# Altium PCB Aurduino_Nano.PcbDoc
Units mil, origin at the board's own origin, x right, y up, seen from the top; angles counter-clockwise.
Board outline 800 x 1680 mil, 4 copper layers (Top Layer, Layer 1, Layer 2, Bottom Layer), stack 23.756 mil thick; 27 components, 40 nets, 160 pads, 31 vias.
Unrouted connection lines stored in the file: 20.
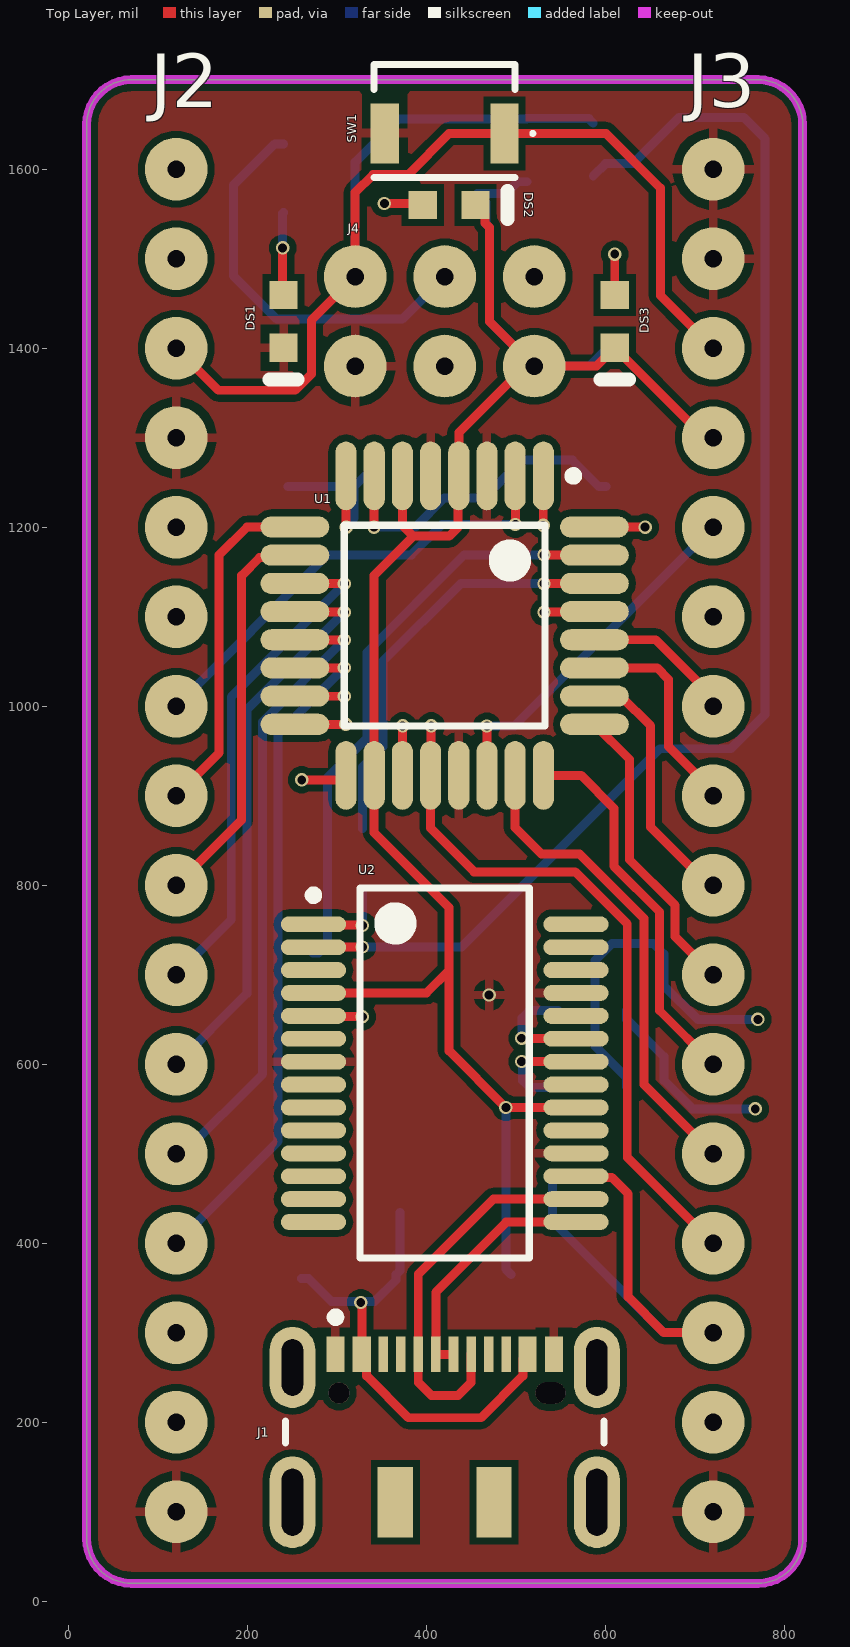
[diagram p0: Top Layer view]
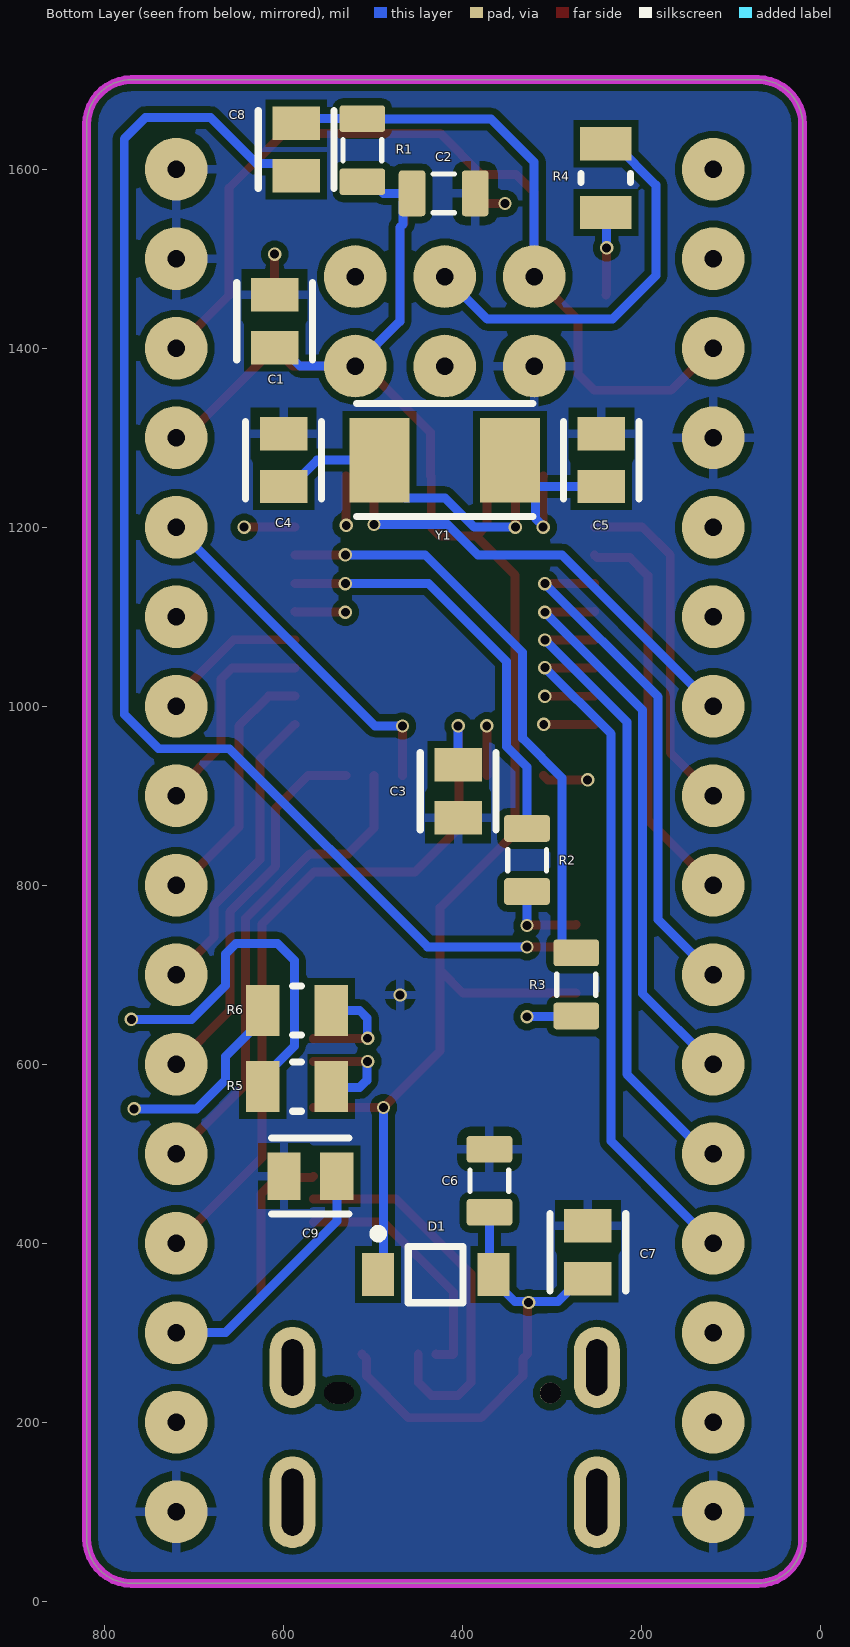
[diagram p1: Bottom Layer view, seen from below]
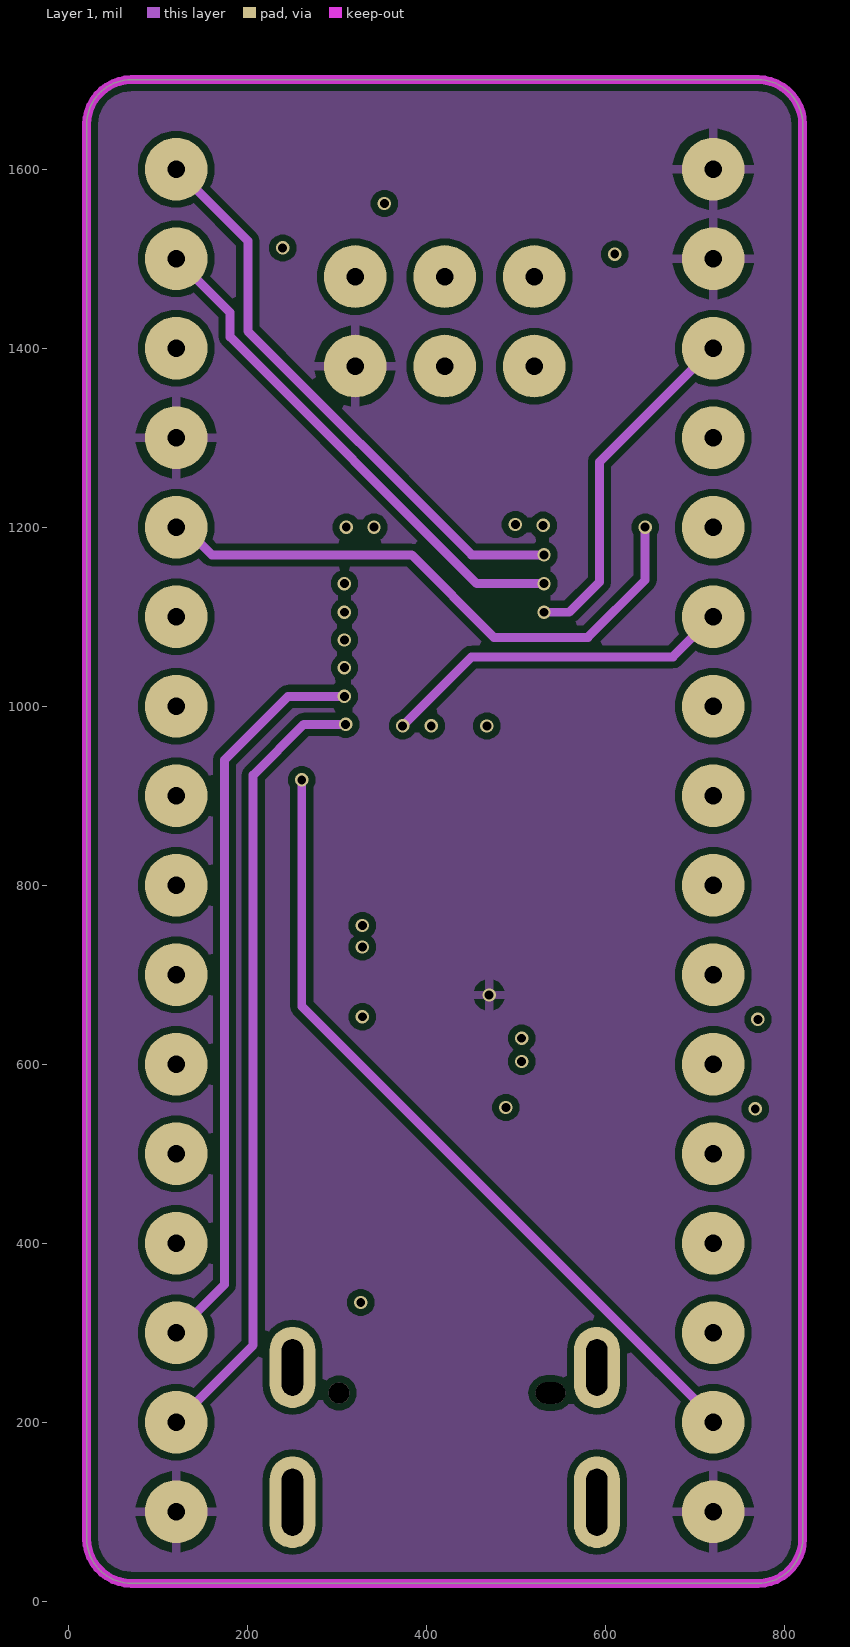
[diagram p2: Layer 1]
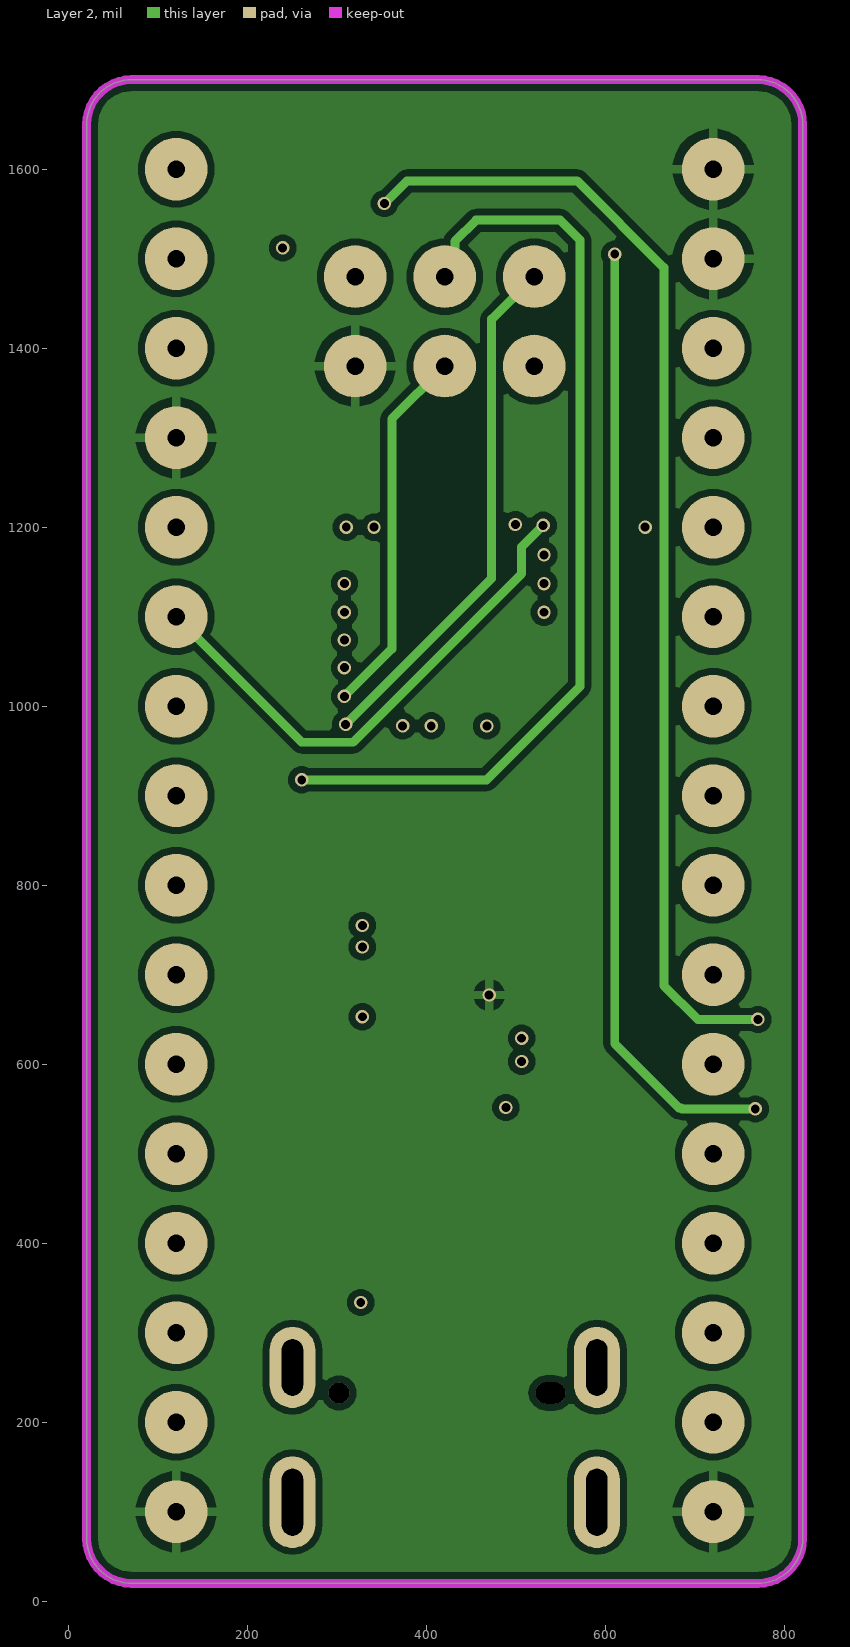
[diagram p3: Layer 2]
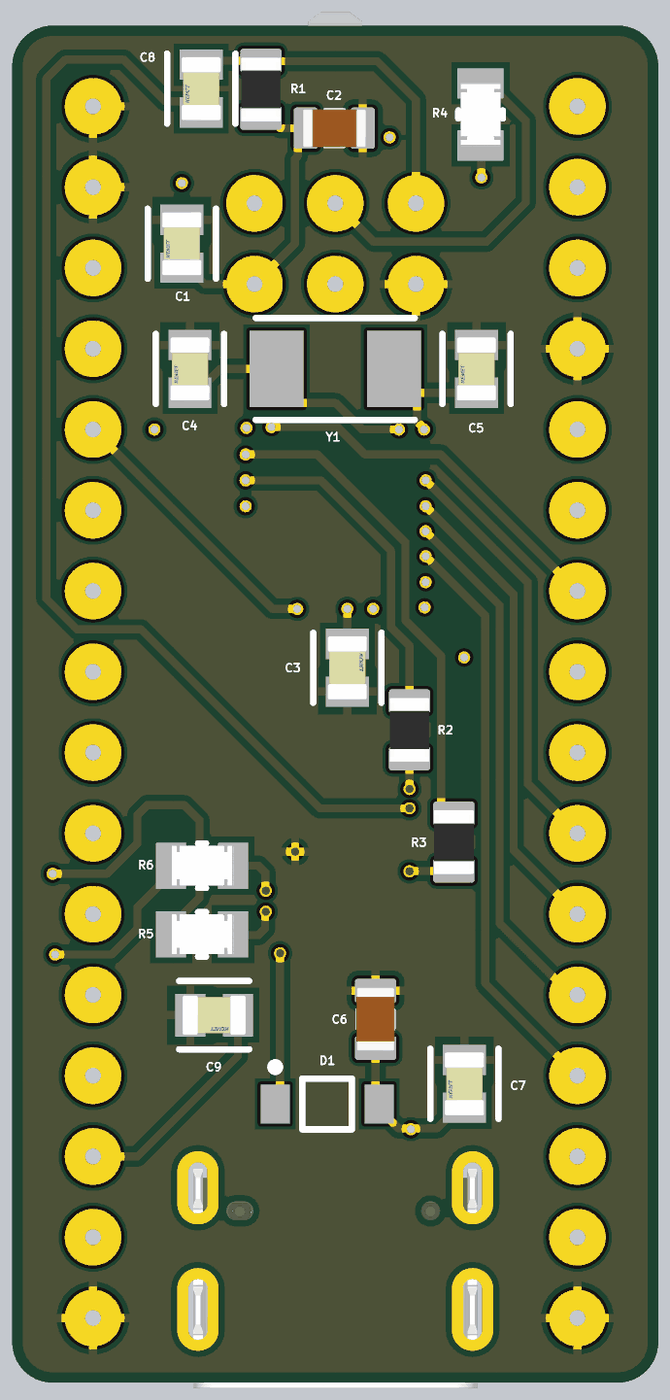
[diagram p4: 3D render of the assembled board from below, using the file's embedded part models]

## Layer stack, top to bottom
Top Solder: solder mask 0.4, Solder Resist, Dk 3.5
Top Layer: signal copper 1.4
Dielectric 2: prepreg 2.8, PP-006, Dk 4.1
Layer 1: signal copper 1.378
Dielectric 3: core 12.6, FR-4, Dk 4.8
Layer 2: signal copper 1.378
Dielectric 4: prepreg 2.8, PP-006, Dk 4.1
Bottom Layer: signal copper 1.4
Bottom Solder: solder mask 0.4, Solder Resist, Dk 3.5

## Board outline
20,70 20,1650 cw(c70,1650) 70,1700 770,1700 cw(c770,1650) 820,1650 820,70 cw(c770,70) 770,20 70,20 cw(c70,70)

## Design rules (kind name [scope] priority, off if disabled: settings)
Clearance [All] p1: gap=7.5 ignorepadtopadclearanceinfootprint=TRUE
MinimumSolderMaskSliver [All] p1: minsoldermaskwidth=0.4
PolygonConnect [All] p1: connectstyle=Relief reliefconductorwidth=10 reliefentries=4 polygonreliefangle="90 Angle" airgapwidth=10
RoutingVias [All] p1: holewidth=28 width=50 viastyle="Through Hole" minholewidth=7.5 minwidth=50 maxholewidth=10 maxwidth=50
SilkToSolderMaskClearance [IsPad] p1: minsilkscreentomaskgap=2 clearancetoexposedcopper=TRUE
SolderMaskExpansion [All] p1: expansion=4 istentingtop=FALSE
Width [All] p1: maxlimit=15 minlimit=5 preferedwidth=10
28 further rules are at their usual default settings.

## Classes and differential pairs
component class 3_Connectors: J2 J4
component class 2_Power_Supply: C6 C7 C8 C9 D1 DS2 DS3 J1 R5 R6 U2
component class 1_uC: C1 C2 C3 C4 C5 DS1 R1 R2 R3 R4 SW1 U1 Y1

## Components (designator, comment, footprint, x,y, rotation, side; value= is the part's Value field where it differs from the comment)
C1 "0.1uF" FP-C0805C-DN-MFG 610,1430 r90 bottom value="0.10 μF"
C2 "Capacitor 4.7µF +/-40% 25V 0805" CAPC0805(2012)145_L 421,1573 r180 bottom value=4.7µF
C3 "0.1uF" FP-C0805C-DN-MFG 405,905 r270 bottom value="0.10 μF"
C4 "22pF" FP-C0805C-DN-MFG 600,1275 r90 bottom value="22 pF"
C5 "22pF" FP-C0805C-DN-MFG 245,1275 r90 bottom value="22 pF"
C6 "Capacitor 4.7µF +/-40% 25V 0805" CAPC0805(2012)145_L 370,470 r90 bottom value=4.7µF
C7 "0.1uF" FP-C0805C-DN-MFG 260,390 r90 bottom value="0.10 μF"
C8 "0.1uF" FP-C0805C-DN-MFG 586,1622 r90 bottom value="0.10 μF"
C9 "0.1uF" FP-C0805C-DN-MFG 570,475 r0 bottom value="0.10 μF"
D1 "MBR0520LT3G" ONSC-SOD-123-2-425-04_V 430,365 r180 bottom
DS1 "HSMA-C190" AVAG-HSMX-C190_V 240,1430 r270 top
DS2 "Tx_LED" EVRL-0603-2_V 425,1560 r0 top
DS3 "Rx_LED" EVRL-0603-2_V 610,1430 r270 top
J1 "DX07S016JA1R1500" FP-DX07S016JA1R1500-MFG 420,150 r0 top
J2 "BBL-116-T-E" BBL-116-T-E 120,1600 r0 top
J3 "BBL-116-T-E" BBL-116-T-E 720,1600 r0 top
J4 "TD-103-T-A" TD-103-T-A 520,1480 r270 top
R1 "1KR5J" RESC0805(2012)_L 512,1621 r270 bottom value=1k
R2 "1KR5J" RESC0805(2012)_L 328,828 r270 bottom value=1k
R3 "1KR5J" RESC0805(2012)_L 273,689 r270 bottom value=1k
R4 "330" FP-CRCW0805-e3-MFG 240,1590 r90 bottom
R5 "330" FP-CRCW0805-e3-MFG 585,575 r0 bottom
R6 "330" FP-CRCW0805-e3-MFG 585,660 r0 bottom
SW1 "B3U-3000P" OMRON-B3U-3000P_V 420,1640 r180 top
U1 "ATmega328P-AU" 32A_M 420,1090 r270 top
U2 "FT232RL" FTDI-SSOP-28_M 420,590 r0 top
Y1 "16MHz" JPY-X053201602002_V 420,1275 r180 bottom

## Footprints (in the part's own frame and the unit in brackets; to place one, negate y for a bottom-side part, rotate by r counter-clockwise, add the part's x,y. Pads: shape width x height; smd on the part's side, far side on the other; paste and mask are expansions set on the pad)
32A_M [mm] "Thin QFP, 32-Leads, Body 7x7mm, Pitch 0.8mm, IPC Low Density"
  oval 1.95x0.6 smd: 1(-4.25,2.8) 2(-4.25,2) 3(-4.25,1.2) 4(-4.25,0.4) 5(-4.25,-0.4) 6(-4.25,-1.2) 7(-4.25,-2) 8(-4.25,-2.8) 17(4.25,-2.8) 18(4.25,-2) 19(4.25,-1.2) 20(4.25,-0.4) 21(4.25,0.4) 22(4.25,1.2) 23(4.25,2) 24(4.25,2.8)
  oval 0.6x1.95 smd: 9(-2.8,-4.25) 10(-2,-4.25) 11(-1.2,-4.25) 12(-0.4,-4.25) 13(0.4,-4.25) 14(1.2,-4.25) 15(2,-4.25) 16(2.8,-4.25) 25(2.8,4.25) 26(2,4.25) 27(1.2,4.25) 28(0.4,4.25) 29(-0.4,4.25) 30(-1.2,4.25) 31(-2,4.25) 32(-2.8,4.25)
  silkscreen extent -4.37,-2.85 2.85,3.78, body extent -3.5,-3.5 3.5,3.5, height 1.2
AVAG-HSMX-C190_V [mm] "SMD, 2-Leads, Body 1.6x0.8mm, Height 0.9mm"
  rect 0.8x0.8 smd: 1(-0.75,0) 2(0.75,0)
  silkscreen extent 1.65,-0.4 1.65,0.4, body extent -0.8,-0.4 0.8,0.4, height 0.9
BBL-116-T-E [mm] "16 POS Header, Through Hole"
  round 1.78 hole 0.5: 1(0,0) 2(0,-2.54) 3(0,-5.08) 4(0,-7.62) 5(0,-10.16) 6(0,-12.7) 7(0,-15.24) 8(0,-17.78) 9(0,-20.32) 10(0,-22.86) 11(0,-25.4) 12(0,-27.94) 13(0,-30.48) 14(0,-33.02) 15(0,-35.56) 16(0,-38.1)
CAPC0805(2012)145_L [mm] "Chip Capacitor, Body 2.0x1.2mm, Height 1.45mm, IPC High Density"
  rrect25% 0.76x1.3 smd: 1(-0.9,0) 2(0.89,0)
  silkscreen extent -0.3,-0.55 0.3,0.55, body extent -1,-0.6 1,0.6, height 1.45
EVRL-0603-2_V [mm] "SMD, 2-Leads, Body 1.6x0.8mm"
  rect 0.8x0.8 smd: 1(-0.75,0) 2(0.75,0)
  silkscreen extent 1.65,-0.4 1.65,0.4, body extent -0.8,-0.4 0.8,0.4, height 0.5
FP-C0805C-DN-MFG [mm]
  rect 0.95x1.35 smd paste+0 mask+0: 1(-0.75,0) 2(0.75,0)
  silkscreen extent -1.1,-1.07 1.1,1.07, body extent -1,-0.63 1,0.63, height 0.88
FP-CRCW0805-e3-MFG [mm]
  rect 0.95x1.45 smd paste+0 mask+0: 1(-0.975,0) 2(0.975,0)
  silkscreen extent -0.13,-0.7 0.13,0.7, body extent -1,-0.63 1,0.63, height 0.5
FP-DX07S016JA1R1500-MFG [mm]
  rrect100% 1.3x2.3 hole 1.6 slot 0.6 at 0 deg paste-1000 mask+0: 1(-4.32,2.825) 2(4.32,2.825)
  rrect100% 1.3x2.6 hole 1.9 slot 0.6 at 0 deg paste-1000 mask+0: 3(-4.32,-1) 6(4.32,-1)
  rect 1x2 smd paste+0 mask+0: 4(-1.4,-1) 5(1.4,-1)
  rect 0.52x1 smd paste+0 mask+0: A1/B12(-3.1,3.2) A4/B9(-2.35,3.2) A12/B1(3.1,3.2) B4/A9(2.35,3.2)
  rect 0.27x1 smd paste+0 mask+0: A5(-1.75,3.2) A6(-0.25,3.2) A7(0.75,3.2) A8(1.75,3.2) B5(1.25,3.2) B6(0.25,3.2) B7(-0.75,3.2) B8(-1.25,3.2)
  round 0.6 hole 0.6 unplated paste-1000 mask+0: ""(-3,2.1)
  rrect100% 0.85x0.6 hole 0.6 slot 0.85 at 0 deg unplated paste-1000 mask+0: ""(3,2.1)
  silkscreen extent -4.52,0.67 4.52,4.37, body extent -5.07,-3.75 5.07,4.08, height 0.25
FTDI-SSOP-28_M [mm] "SOP, 28-Leads, Body 10.5x5.6mm, Pitch 0.65mm, IPC Low Density"
  oval 1.85x0.45 smd: 1(-3.725,4.225) 2(-3.725,3.575) 3(-3.725,2.925) 4(-3.725,2.275) 5(-3.725,1.625) 6(-3.725,0.975) 7(-3.725,0.325) 8(-3.725,-0.325) 9(-3.725,-0.975) 10(-3.725,-1.625) 11(-3.725,-2.275) 12(-3.725,-2.925) 13(-3.725,-3.575) 14(-3.725,-4.225) 15(3.725,-4.225) 16(3.725,-3.575) 17(3.725,-2.925) 18(3.725,-2.275) 19(3.725,-1.625) 20(3.725,-0.975) 21(3.725,-0.325) 22(3.725,0.325) 23(3.725,0.975) 24(3.725,1.625) 25(3.725,2.275) 26(3.725,2.925) 27(3.725,3.575) 28(3.725,4.225)
  silkscreen extent -3.85,-5.25 2.4,5.25, body extent -3.9,-5.25 3.9,5.25, height 2
JPY-X053201602002_V [mm] "SMD, 2-Leads, Body 5x3.2mm"
  rect 1.7x2.4 smd: 1(-1.85,0) 2(1.85,0)
  silkscreen extent -2.5,-1.6 2.5,1.6, body extent -2.5,-1.6 2.5,1.6, height 1.35
OMRON-B3U-3000P_V [mm] "SMD, 2-Leads, Body 4x3.2mm"
  rect 0.8x1.7 smd: 1(-1.7,0) 2(1.7,0)
  silkscreen extent -2.55,-1.95 2,1.25, body extent -2,-1.95 2,1.25, height 1.2
ONSC-SOD-123-2-425-04_V [mm] "SOD, 2-Leads, Body 2.69x1.6mm"
  rect 0.91x1.22 smd: 1(-1.635,0) 2(1.635,0)
  silkscreen extent -1.76,-0.8 0.78,1.28, body extent -1.35,-0.8 1.35,0.8, height 1.35
RESC0805(2012)_L [mm] "Chip Resistor, Body 2.0x1.3mm, IPC High Density"
  rrect25% 0.76x1.3 smd: 1(-0.9,0) 2(0.89,0)
  silkscreen extent -0.3,-0.55 0.3,0.55, body extent -1,-0.62 1,0.63, height 0.6
TD-103-T-A [mm]
  round 1.78 hole 0.5: 1(0,0) 2(2.54,0) 3(0,-2.54) 4(2.54,-2.54) 5(0,-5.08) 6(2.54,-5.08)

## Part data
C1 C3 C7 C8 C9: library part CMP-03020-002581-2, "C0805 0.10 μF X7R 30ppm/°C 20.00% 50 V", Capacitance="0.10 μF", Manufacturer=KEMET, Manufacturer Part Number=C0805C104M5RAC, Package=C0805C-DN, Temperature="-55°C to +125°C", Temperature Characteristic=X7R, Temperature Coefficient=30ppm/°C, Temperature Range High=+125°C, Temperature Range Low=-55°C, Tolerance=0.2, Voltage Rating="50 V", Automotive=No, Category=Cap, ComponentLink2Description=Datasheet, ComponentLink2URL=https://content.kemet.com/datasheets/KEM_C1003_C0G_SMD.pdf, Device Class L1="Passive Components", Device Class L2=Capacitors, Device Class L3="Ceramic Capacitors", Height=0.88mm, Ipc Land Pattern Name=CAPC200125X78, Lead Free=Yes, Material=Ceramic, Mouser Description="Multilayer Ceramic Capacitors MLCC - SMD/SMT 50volts 0.1uF 20% X7R", Octopart=https://octopart.com/c0805c104m5rac-kemet-2226142, RoHS=TRUE
C2 C6: library part CMP-001-00080-4, "Chip Capacitor, 4.7µF +/-40%, 25V, 0805, Thickness 1.45 mm", Case/Package=0805, Max Operating Temperature=85°C, Min Operating Temperature=-55°C, Tolerance=20%, Voltage Rating=25V, Mounting Technology=SMT, Pins=2
C4 C5: library part CMP-03020-014766-1, "C0805 22 pF X8R 30ppm/°C 5.00% 50 V", Capacitance="22 pF", Manufacturer=KEMET, Manufacturer Part Number=C0805C220J5HACTU, Package=C0805C-DN, Temperature="-55°C to +125°C", Temperature Characteristic=X8R, Temperature Coefficient=30ppm/°C, Temperature Range High=+125°C, Temperature Range Low=-55°C, Tolerance=0.05, Voltage Rating="50 V", Automotive=No, Category=Cap, ComponentLink2Description=Datasheet, ComponentLink2URL=https://content.kemet.com/datasheets/KEM_C1003_C0G_SMD.pdf, Device Class L1="Passive Components", Device Class L2=Capacitors, Device Class L3="Ceramic Capacitors", Height=0.88mm, Ipc Land Pattern Name=CAPC200125X78, Lead Free=Yes, Material=Ceramic, Octopart=https://octopart.com/c0805c220j5hactu-kemet-88697040, RoHS=TRUE
D1: library part CMP-1055-00408-1, "Schottky Power Rectifier, 2-Pin SOD-123, Pb-Free, Tape and Reel", Manufacturer="On Semiconductor", ComponentLink1Description="Manufacturer URL", ComponentLink1URL=http://www.onsemi.com/, ComponentLink2Description=Datasheet, ComponentLink2URL=http://www.onsemi.cn/pub_link/Collateral/MBR0520LT1-D.PDF, ComponentLink3Description="Package Specification", ComponentLink3URL=http://www.onsemi.com/pub_link/Collateral/425-04.PDF, Configuration=Single, DatasheetVersion="Rev. 6", IFSM Max (A)=5.5, Mounting Technology="Surface Mount", PackageDescription="2-Pin SOD, Body 1.6 x 2.69 mm", PackageReference=SOD-123-2-425-04, PackageVersion="Rev. G, 10/2009", Packing="Tape and Reel", PartNumber=MBR0520LT3G, RoHS=TRUE
DS1: library part CMP-007-00011-2, "LED Uni-Color Amber, 60 mW, 20 mA, -40 to 85 degC, 2-Pin SMD, RoHS, Tape and Reel", Case/Package=0603, Colour=Orange, Forward Current=20mA, Forward Voltage=1.9V, Manufacturer=Avago, Max Operating Temperature=85°C, Min Operating Temperature=-40°C, Package Description="2-Pin Surface Mount Device, Body 1.6 x 0.8 mm, Height 0.9 mm", Package Quantity=4000, Package Reference=HSMX-C190, Power=60mW, Datasheet URL=http://docs.avagotech.com/docs/AV02-0112EN, Datasheet Version=Sep-10, Illumination Colour=Orange, Lens Style=Diffused, Luminous Intensity=90mcd, Manufacturer URL=http://www.avagotech.com/, Mounting Technology=SM, Nominal Vf=1.9V, Packaging=TapeandReel, Pins=2, RoHS Compliant=True, Viewing Angle=170degrees
DS2: library part CMP-007-00002-2, "Chip LED, Yellow-Green, 5 V, 25 mA, -40 to 85 degC, 2-Pin SMD (0603), RoHS, Tape and Reel", Case/Package=0603, Colour=Green, Forward Voltage=2V, Manufacturer="Everlight Electronics", Package Description="2-Pin Surface Mount Device, Body 1.6 x 0.8 mm", Datasheet URL=https://datasheet.ciiva.com/48679/19-217-g7c-an1p2-3t-48679179.pdf, Datasheet Version="Rev. 1, 04/2006", Lens Style=Clear, Manufacturer URL=http://www.everlight.com/, Mounting Technology=SM, Package Reference=0603, Pins=2, RoHS Compliant=True, Viewing Angle=120degrees
DS3: library part CMP-007-00004-2, "Chip LED, Red, 5 V, 25 mA, -40 to 85 degC, 2-Pin SMD (0603), RoHS, Tape and Reel", Case/Package=0603, Colour=Red, Forward Voltage=2.2V, Manufacturer="Everlight Electronics", Package Description="2-Pin Surface Mount Device, Body 1.6 x 0.8 mm", Datasheet URL=https://datasheet.ciiva.com/4688/el-19-217-r6c-al1m2vy-3tpdf-187026-4688713.pdf, Datasheet Version="Rev. 1, 01/2005", Lens Style=Clear, Manufacturer URL=http://www.everlight.com/, Mounting Technology=SM, Package Reference=0603, RoHS Compliant=False
J1: library part CMP-19038-000003-1, "CONN RCP USB2.0 TYP C 24P SMD RA"
J2 J3: "16 POS Header, Through Hole"
J4: "AVRISP MK2"
R1 R2 R3: library part CMP-009-00076-2, "1K 0.125W 5% 0805 (2012 Metric)  SMD", Case/Package=0805, Power=125mW, Tolerance=5%, Mounting Technology=SMT, Pins=2
R4 R5 R6: library part CMP-2001-03823-2, "RES Thick Film, 330Ω, 1%, 0.125W, 100ppm/°C, 0805", Case Code (Imperial)=0805, Case Code (Metric)=2012, Max Operating Temperature=155°C, Max Power Dissipation=125mW, Min Operating Temperature=-55°C, Package Quantity=10, Resistance=330R, Temperature Coefficient=100ppm/°C, Tolerance=1%, Voltage Rating=150V, Case/Package=0805, Composition="Thick Film", Contact Plating=Tin, Depth=1.25mm, Features="Automotive AEC-Q200", Height=0.02inch, Lead Free="Lead Free", Length=2mm, Military Standard=Not, Mount="Surface Mount", Number of Terminations=2, Packaging="Tape and Reel", Power Rating=125mW, Termination=SMD/SMT, Voltage Rating (DC)=150V, Weight=0.000194oz, Width=0.049inch
SW1: library part CMP-011-00005-2, "Tactile Switch, SPST-NO, 0.05 A, 12 V, -25 to 70 degC, 2-Pin SMD, RoHS, Tape and Reel", Contact Current Rating=50mA, IP Rating=IP40, Manufacturer="Omron Electronic Components", Max Contact Resistance=100mohm, Max Operating Temperature=70°C, Max Voltage Rating (DC)=12V, Min Operating Temperature=-25°C, Operating Force=162gf, Package Description="2-Pin Surface Mount Device, Body 4 x 3.2 mm", Package Quantity=4000, Case/Package=B3U-3000P, Contact Material=Silver, Current Rating=50mA, Datasheet URL=https://www.omron.com/ecb/products/pdf/en-b3u.pdf, Datasheet Version=Jan-15, Manufacturer URL=http://www.omron.com/, Max Current Rating=50mA, Mounting Technology=SM, Package Reference=B3U-3000P, Packaging=TapeandReel, RoHS Compliant=True, Throw Configuration=SPST, Voltage Rating=12V, Voltage Rating (DC)=12V
U1: library part CMP-0095-00269-2, "8-bit AVR Microcontroller, 32KB Flash, 1KB EEPROM, 2KB SRAM, 32-pin TQFP, Industrial Grade (-40°C to 85°C)", Code_JEDEC=MS-026-ABA, ComponentLink1Description="Manufacturer URL", ComponentLink1URL=http://www.atmel.com/, ComponentLink2Description="ATmega48A/48PA/88A/88PA/168A/168PA/328/328P Datasheet", ComponentLink2URL=http://www.atmel.com/dyn/resources/prod_documents/doc8271.pdf, ComponentLink3Description="ATmega48A/48PA/88A/88PA/168A/168PA/328/328P Summary", ComponentLink3URL=http://www.atmel.com/dyn/resources/prod_documents/8271S.pdf, DatasheetVersion="revD, May-2011", PackageDescription="32-Lead, 7x7x1.0 mm Body, 0.8mm Lead Pitch, Thin Profile Plastic Quad Flat Package (TQFP)", PackageReference=32A, PackageVersion="revC, Oct-2010", RevisionNote="DatasheetVersion & PackageVersion updated. URLs added."
U2: library part CMP-2000-05029-1, "IC USB FS SERIAL UART 28-SSOP", Manufacturer=FTDI, Maximum Operating Temperature=+85degC, Minimum Operating Temperature=-40degC, Package Type=SSOP, Datasheet URL=http://datasheet.octopart.com/FT232RL-FTDI-datasheet-120501.pdf, Datasheet Version="Rev. 1.04, 02/2006", Dimensions=10.2x5.3x1.75mm, Height=1.75mm, Length=10.2mm, Manufacturer URL=http://www.ftdichip.com/, Maximum Data Rate=3MBd, Mounting Type=SurfaceMount, Number of Channels per Chip=1, Pin Count=28, Receive FIFO=256B, Transmit FIFO=128B, Width=5.3mm
Y1: library part CMP-003-00006-2, "SMD Crystal, 16 MHz, +/- 20 ppm, 8 pF, -20 to 70 degC, 2-Pin SMD", Case/Package=X053201602002, Manufacturer="Shenzhen Jingpengyuan", Package Description="2-Pin Surface Mount Device, Body 5 x 3.2 mm", Datasheet URL=http://datasheet.octopart.com/X053201602002-Jingpengyuan-datasheet-62330935.pdf, Datasheet Version=May-13, Frequency=16MHz, Manufacturer URL=http://www.chjiahui.com/, Mounting Technology=SM, Package Reference=X053201602002, RoHS Compliant=Unknown

## Via types
v1: diameter 15, hole 10, Top Layer to Bottom Layer, 31 vias

## Nets (pads, with @x,y where several pads share a name; then routed paths per layer and width w, separated by ;. In a path a pad name is that pad's centre, name@x,y a point inside that pad or via, vN(x,y) a via of type N, cw(c..) or ccw(c..) an arc to the next point about the centre after c; other vN are vias at no path point)
+3V3: C9.1 J3.14 U2.17 | length 574.7
  Top Layer w10: U2.17 568.05,473.44 606.56,473.44 625,455 625,340 665,300 J3.14
  Bottom Layer w10: C9.1 540.47,424.53 665,300 J3.14
+5: C1.1 C2.1 D1.1 DS2.2 DS3.2 J3.4 J4.2 R1.2 U1.4 U1.6 U1.18 U2.4 U2.20 | length 2330.6
  Top Layer w10: U2.4 399.57,679.57 425,705 ; U1.6 372.76,1202.24 385,1190 ; DS2.2 465.28,1549.25 465.28,1539.72 470,1535 470,1430 J4.2 ; U2.20 v1(488.39,551.61) 425,615 425,705 ; J3.4 710.47,1300 DS3.2 589.53,1380 J4.2 ; 385,1190 341.26,1146.26 U1.18 341.26,858.74 425,775 425,705 ; 385,1190 425,1190 435,1200 435,1256.57 U1.4 435.75,1305.75 510,1380 J4.2
  Bottom Layer w10: v1(488.39,551.61) 488.39,370.98 D1.1 ; R1.2 501.37,1585.96 488.41,1573 C2.1 466.39,1563.04 466.39,1538.61 470,1535 470,1430 J4.2 581.65,1380 602.13,1400.47 C1.1
A0: J3.12 U1.23 | length 539.2
  Top Layer w10: U1.23 498.74,864.26 528,835 570.51,835 642.5,763.01 642.5,577.5 J3.12
A1: J3.11 U1.24 | length 425.9
  Top Layer w10: U1.24 572.32,922.68 609,886 609,821.25 660,770.25 660,660 J3.11
A2: J3.10 U1.25 | length 334.7
  Top Layer w10: U1.25 626.5,940.59 626.5,828.5 677.5,777.5 677.5,742.5 J3.10
A3: J3.9 U1.26 | length 286.4
  Top Layer w10: U1.26 616.78,1011.26 650,978.04 650,865 715,800 J3.9
A4: J3.8 U1.27 | length 238.7
  Top Layer w10: U1.27 657.24,1042.76 670,1030 670,955 720,905 J3.8
A5: J3.7 U1.28 | length 169.3
  Top Layer w10: U1.28 655.75,1074.25 720,1010 J3.7
A6: J3.6 U1.19 | length 453
  Top Layer w10: U1.19 372.88,922.8 372.88,977.88 v1(373,978)
  Layer 1 w10: v1(373,978) 450,1055 675,1055 J3.6
A7: J3.5 U1.22 | length 400.1
  Top Layer w10: v1(467.14,977.86) 467.19,977.81 U1.22 U1.22
  Bottom Layer w10: v1(467.14,977.86) 467.28,978 498,978 J3.5
AREF: C3.1 J3.13 U1.20 | length 818.6
  Top Layer w10: v1(405,978) 404.63,977.63 404.63,923.05 U1.20 404.25,863.75 453,815 565.76,815 624,756.76 624,496 J3.13
  Bottom Layer w10: C3.1 v1(405,978)
D0/Rx: J2.2 R2.1 U1.30 | length 1045.7
  Top Layer w10: v1(531,1137) 531.12,1137.12 587.2,1137.12 U1.30
  Layer 1 w10: J2.2 180.25,1439.75 180.25,1412.75 456,1137 v1(531,1137)
  Bottom Layer w10: R2.1 328,932 351,955 351,1050 438,1137 v1(531,1137)
D1/Tx: J2.1 R3.1 U1.31 | length 1312.2
  Top Layer w10: v1(531,1169) 531.13,1168.87 587.19,1168.87 U1.31
  Layer 1 w10: J2.1 200,1520 200,1419 450,1169 v1(531,1169)
  Bottom Layer w10: R3.1 279.04,724.43 289,734.39 289,920 333,964 333,1060 442,1169 v1(531,1169)
D2: J2.5 U1.32 | length 717.2
  Top Layer w10: U1.32 587.44,1200.12 643.88,1200.12 v1(644,1200)
  Layer 1 w10: J2.5 128.77,1200 159.77,1169 383,1169 475,1077 580,1077 644,1141 v1(644,1200)
D3: J2.6 U1.1 | length 641.4
  Top Layer w10: v1(530,1202) 530.12,1202.12 530.12,1257.2 U1.1
  Layer 2 w10: J2.6 260.27,959.73 317.6,959.73 506,1148.14 506,1178 v1(530,1202)
D4: J2.7 U1.2 | length 517.5
  Top Layer w10: U1.2 498.87,1257.19 498.87,1203.13 v1(499,1203)
  Bottom Layer w10: J2.7 289,1169 382.82,1169 416.82,1203 v1(499,1203)
D5: J2.8 U1.9 | length 386.5
  Top Layer w10: J2.8 168,948 168,1169 199.24,1200.24 U1.9
D6: J2.9 U1.10 | length 445.3
  Top Layer w10: J2.9 193,873 193,1146 213.13,1166.13 250.07,1166.13 U1.10
D7: J2.10 U1.11 | length 570.3
  Top Layer w10: U1.11 252.8,1137.12 307.88,1137.12 v1(308,1137)
  Bottom Layer w10: J2.10 181.5,761.5 181.5,1010.5 v1(308,1137)
D8: J2.11 U1.12 | length 638.5
  Top Layer w10: U1.12 253.05,1105.37 307.63,1105.37 v1(308,1105)
  Bottom Layer w10: J2.11 199,679 199,996 v1(308,1105)
D9: J2.12 U1.13 | length 711.7
  Top Layer w10: U1.13 252.8,1074.13 307.87,1074.13 v1(308,1074)
  Bottom Layer w10: J2.12 127.5,500 216.5,589 216.5,982.5 v1(308,1074)
D10: J2.13 U1.14 | length 776.3
  Top Layer w10: U1.14 252.8,1042.88 307.88,1042.88 v1(308,1043)
  Bottom Layer w10: J2.13 234,514 234,969 v1(308,1043)
GND: C1.2 C2.2 C3.2 C4.2 C5.2 C6.2 C7.2 C9.2 DS1.2 J1.A1/B12 J1.A12/B1 J2.4 J2.16 J3.1 J3.2 J3.16 J4.6 SW1.2 U1.3 U1.5 U1.21 U2.7 U2.18 U2.21 U2.25
  other v1: 469.69,677.31
MISO: J2.15 J4.1 U1.16 | length 1529.6
  Top Layer w10: U1.16@252.69,979.75 v1(309.31,979.73)
  Layer 1 w10: J2.15 206,286 206,923 262.73,979.73 v1(309.31,979.73)
  Layer 2 w10: v1(309.31,979.73) 472.46,1142.88 472.46,1432.46 J4.1
MOSI: J2.14 J4.4 U1.15 | length 1296.6
  Top Layer w10: U1.15 252.81,1011.13 307.87,1011.13 v1(308,1011)
  Layer 1 w10: J2.14 174,354 174,940 245,1011 v1(308,1011)
  Layer 2 w10: v1(308,1011) 361,1064 361,1321 J4.4
NetC4_1: C4.1 U1.7 Y1.1 | length 367.8
  Top Layer w10: v1(341,1200) 341.13,1200.13 341.13,1257.19 U1.7
  Bottom Layer w10: v1(341,1200) 386.98,1200 419.74,1232.76 464.37,1232.76 492.83,1261.22 Y1.1 562.6,1275 592.13,1245.47 C4.1
NetC5_1: C5.1 U1.8 Y1.2 | length 221.5
  Top Layer w10: U1.8 309.88,1257.2 309.88,1200.12 v1(310,1200)
  Bottom Layer w10: C5.1 Y1.2@318.7,1245.47 ; v1(310,1200) 310,1201.35 318.7,1210.05 Y1.2@318.7,1245.47 ; Y1.2 347.17,1273.94 Y1.2@318.7,1245.47
NetC8_1: C8.1 U2.2 | length 1484.6
  Top Layer w10: U2.2 273.47,730.87 327.87,730.87 v1(328,731)
  Bottom Layer w10: v1(328,731) 439,731 660.46,952.46 739.69,952.46 778,990.77 778,1634 754.14,1657.86 681.86,1657.86 630.17,1606.17 599.7,1606.17 C8.1
NetDS1_1: DS1.1 R4.1 | length 92.9
  Top Layer w10: v1(239,1512) 239,1460.53 DS1.1
  Bottom Layer w10: v1(239,1512) 239,1550.61 R4.1
NetDS2_1: DS2.1 R5.2 | length 1730.8
  Top Layer w10: v1(352.64,1561.64) 393.83,1561.64 DS2.1
  Layer 2 w10: v1(352.64,1561.64) 378,1587 568,1587 665,1490 665,687.77 702.77,650 v1(770,650)
  Bottom Layer w10: R5.2 623.39,584.84 588,620.23 588,716 607,735 653,735 665,723 665,687.77 702.77,650 v1(770,650)
NetDS3_1: DS3.1 R6.2 | length 1325.2
  Top Layer w10: DS3.1 v1(610,1505)
  Layer 2 w10: v1(610,1505) 610,623 682,551 684,551 685,550 v1(767,550)
  Bottom Layer w10: R6.2 623.39,650.16 665.05,608.49 665.05,581.95 697,550 v1(767,550)
NetR5_1: R5.1 U2.22 | length 125.5
  Top Layer w10: v1(506,603) 506.1,602.9 566.55,602.9 U2.22
  Bottom Layer w10: v1(506,603) 506.96,602.04 506.96,582.04 515,574 545.61,574 R5.1
NetR6_1: R6.1 U2.23 | length 127.3
  Top Layer w10: v1(506,629) 506.31,628.69 566.35,628.69 U2.23
  Bottom Layer w10: v1(506,629) 506.5,629.5 506.5,651.5 515,660 R6.1
Reset: C8.2 J2.3 J3.3 J4.5 R1.1 SW1.1 U1.29 | length 1860.7
  Top Layer w10: J2.3 167,1353 253,1353 271,1371 271,1431 J4.5 320,1574 340.04,1594.04 379.04,1594.04 425,1640 SW1.1 600,1640 661,1579 661,1459 J3.3 ; v1(531,1105) 531.37,1105.37 586.95,1105.37 U1.29
  Layer 1 w10: v1(531,1105) 559,1105 593,1139 593,1273 J3.3
  Bottom Layer w10: J4.5 320,1608 368,1656 511.57,1656 R1.1 581.09,1656.43 C8.2
Rx: R2.2 U2.1 | length 93.2
  Top Layer w10: U2.1 274.02,755.67 327.33,755.67 v1(328,755)
  Bottom Layer w10: v1(328,755) R2.2
SCK: J3.15 J4.3 R4.2 U1.17 | length 2467.3
  Top Layer w10: v1(260.31,917.73) 304.82,917.73 U1.17
  Layer 1 w10: v1(260.31,917.73) 260.31,664.54 720,204.85 J3.15
  Layer 2 w10: v1(260.31,917.73) 466.73,917.73 571,1022 571,1521 549,1543 455,1543 431.38,1519.38 431.38,1491.38 J4.3
  Bottom Layer w10: R4.2 230.16,1628.39 184,1582.23 184,1481 232.54,1432.46 372.46,1432.46 J4.3
Tx: R3.2 U2.5 | length 110.5
  Top Layer w10: U2.5 273.83,653.49 327.51,653.49 v1(328,653)
  Bottom Layer w10: R3.2 273.48,653.48 327.52,653.48 v1(328,653)
USB_N: J1.A7 J1.B7 U2.16 | length 434.4
  Top Layer w10: J1.A7 449.53,244.53 435,230 405,230 390.47,244.53 J1.B7 390.47,365.47 474.25,449.25 U2.16
USB_P: J1.A6 J1.B6 U2.15 | length 278.1
  Top Layer w10: J1.B6 429.53,275.67 410.47,275.67 J1.A6 410.16,345.16 488.66,423.66 U2.15
VBUS: C6.1 C7.1 D1.2 J1.A4/B9 J1.B4/A9 | length 527.3
  Top Layer w10: v1@327.48,332.52 J1.A4/B9 332.72,270.75 332.72,251.69 379.41,205 460.59,205 507.28,251.69 507.28,270.75 J1.B4/A9
  Bottom Layer w10: C7.1 267.87,360.47 293.35,335 305,335 305.28,334.72 325.28,334.72 v1(326.24,333.76) 327.2,334.72 341.45,334.72 365.63,358.9 D1.2 370,369.37 C6.1
pads on no net: J1. J1.1 J1.2 J1.3 J1.4 J1.5 J1.6 J1.A5 J1.A8 J1.B5 J1.B8 U2.3 U2.6 U2.8 U2.9 U2.10 U2.11 U2.12 U2.13 U2.14 U2.19 U2.24 U2.26 U2.27 U2.28

## Polygon pours and split planes (outlines as drawn)
GND on Bottom Layer "GND_L04_P003" (solid, remove dead copper, pour order 3): 25,1660 60,1695 780,1695 815,1660 815,60 780,25 60,25 25,60
GND on Layer 2 "GND_L03_P002" (solid, remove dead copper, pour order 2): 25,1660 60,1695 780,1695 815,1660 815,60 780,25 60,25 25,60
GND on Layer 1 "GND_L02_P001" (solid, remove dead copper, pour order 1): 25,1660 60,1695 780,1695 815,1660 815,60 780,25 60,25 25,60
GND on Top Layer "GND_L01_P000" (solid, remove dead copper, pour order 0): 25,1660 60,1695 780,1695 815,1660 815,60 780,25 60,25 25,60 25,65

## Keep-outs
Keep-Out Layer:
  lines w10: 20,70 ccw(c70,70) 70,20 770,20 ccw(c770,70) 820,70 820,1650 ccw(c770,1650) 770,1700 220,1700 70,1700 ccw(c70,1650) 20,1650 20,70